# Altium PCB Flashboard.PcbDoc
Units mil, origin at the board's own origin, x right, y up, seen from the top; angles counter-clockwise.
Board outline 3389.98 x 2760.98 mil, 2 copper layers (Top Layer, Bottom Layer), stack 60.4 mil thick; 10 components, 16 nets, 191 pads, 26 vias.
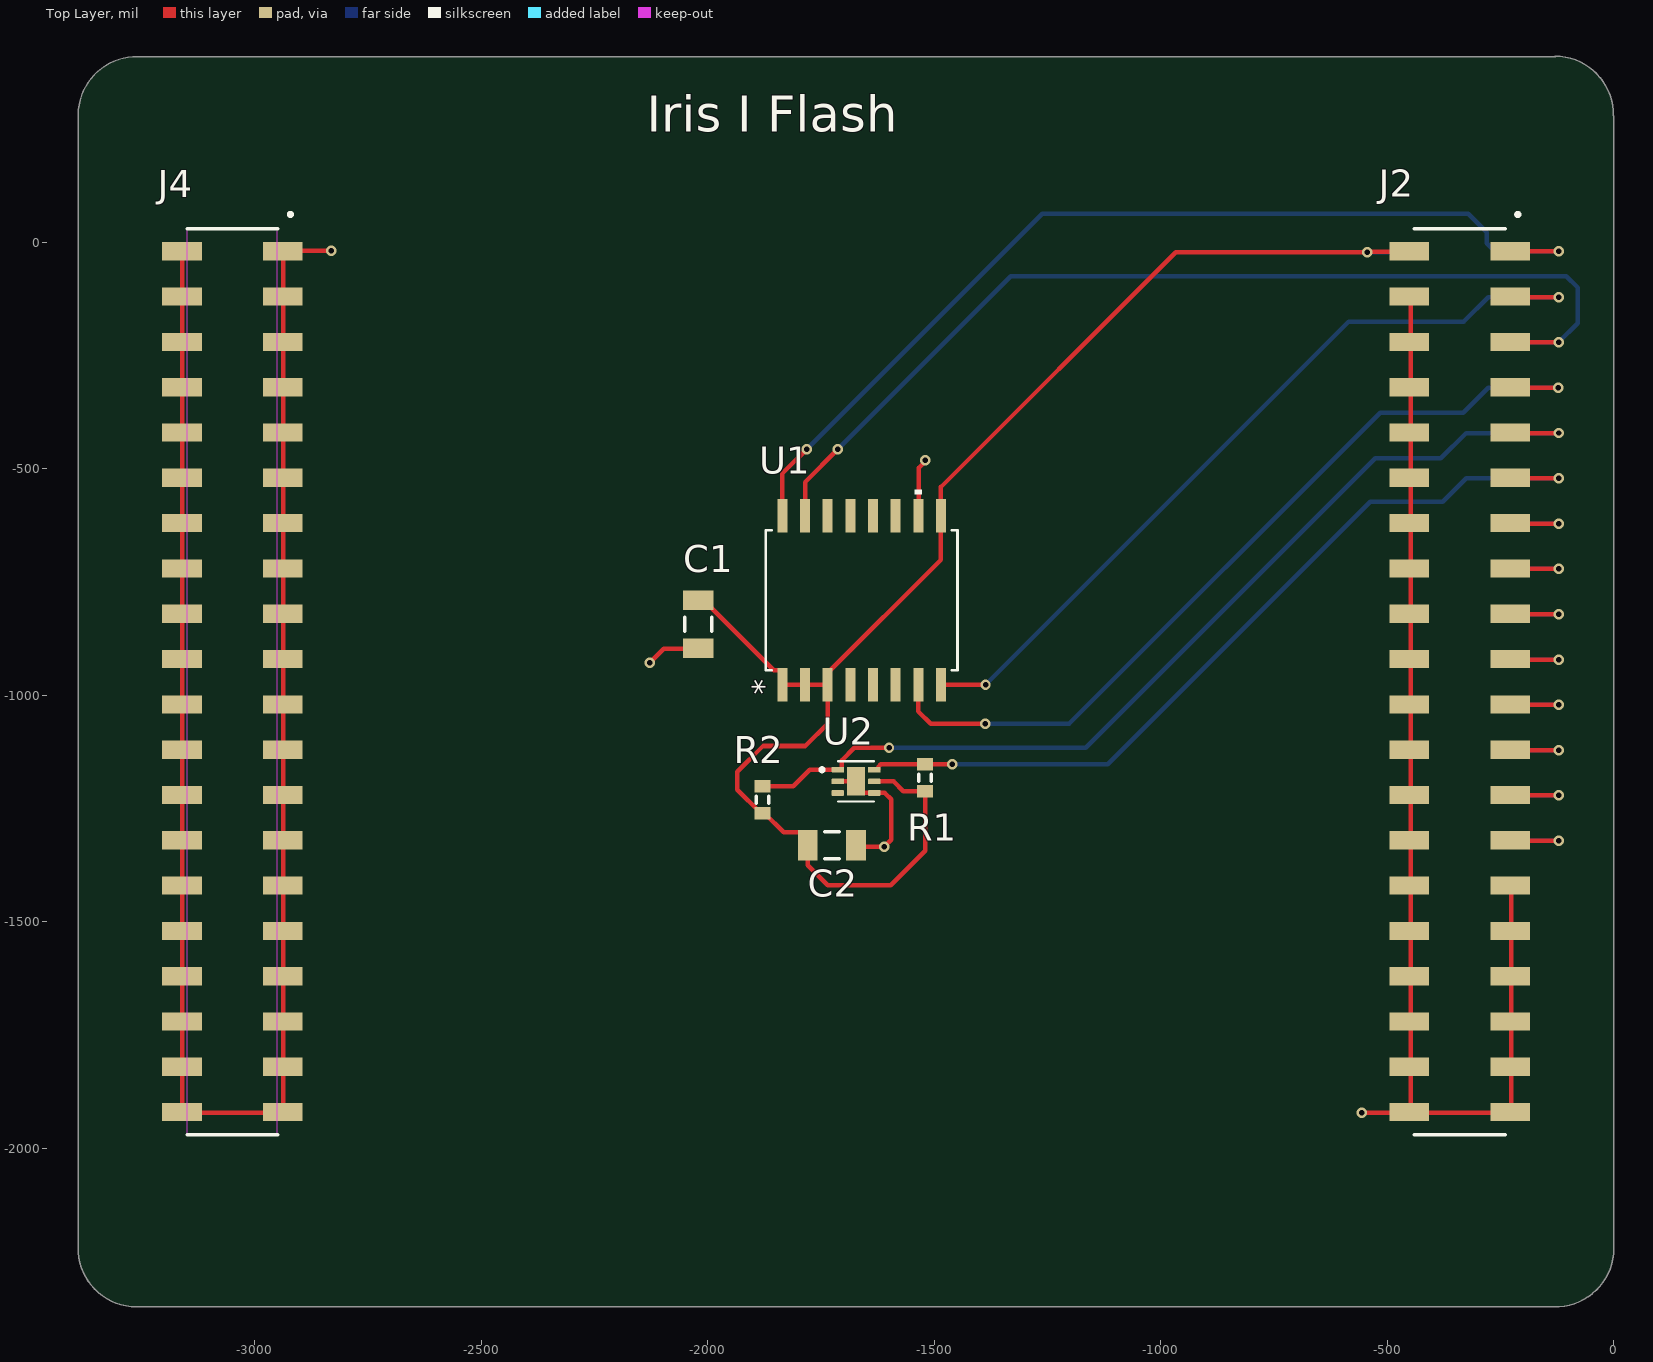
[diagram p0: Top Layer view]
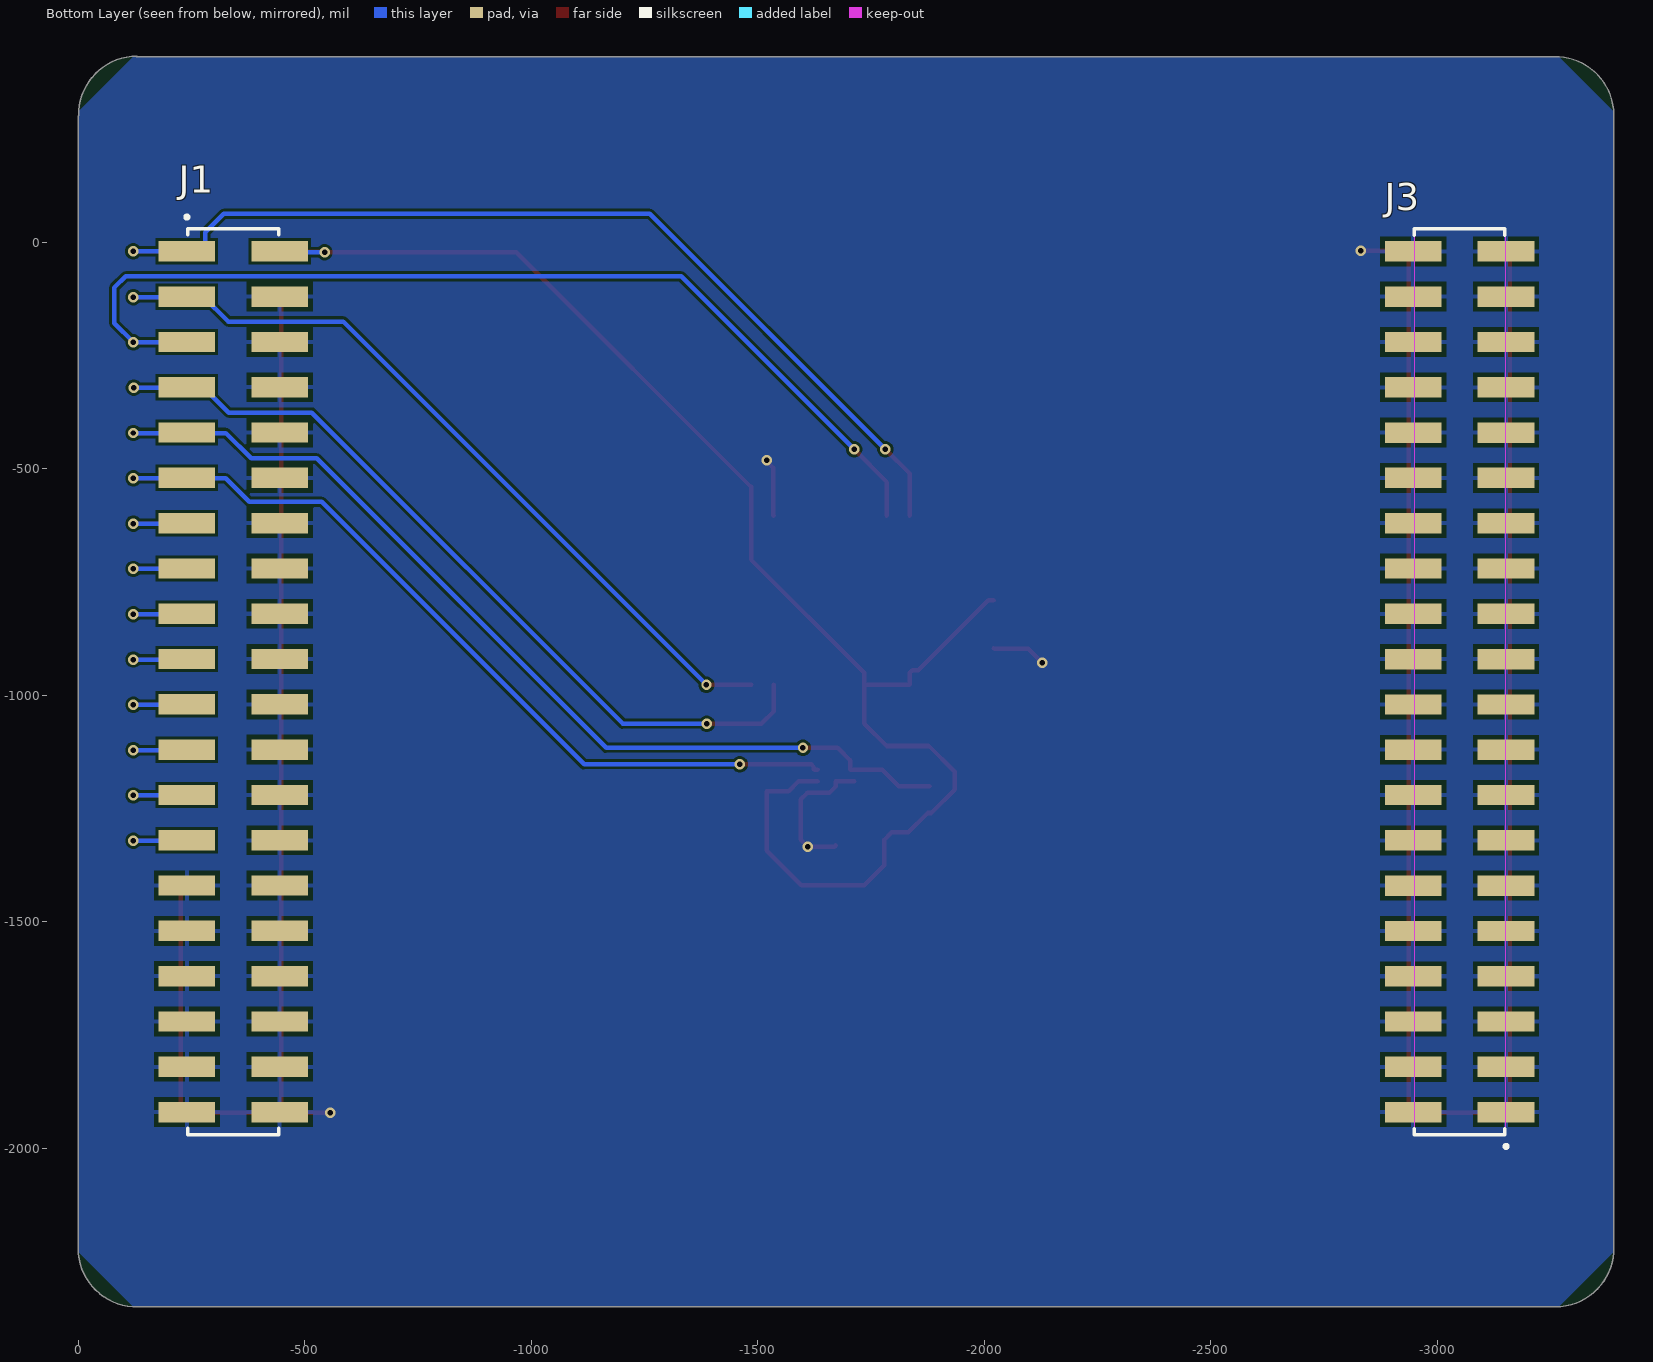
[diagram p1: Bottom Layer view, seen from below]

## Layer stack, top to bottom
Top Solder: solder mask 0.5, Solder Resist, Dk 3.3
Top Layer: signal copper 0.7
Dielectric1: core 59, FR-4, Dk 4.3
Bottom Layer: signal copper 0.7
Bottom Solder: solder mask 0.5, Solder Resist, Dk 3.3

## Board outline
-3389.98,-2218.59 ccw(c-3259.99,-2220.16) -3261.55,-2350.15 -131.55,-2350.15 ccw(c-129.99,-2220.16) 0,-2221.72 0,278.28 -1,279.28 ccw(c-130.99,280.84) -129.43,410.83 -128.43,409.84 -3258.43,409.84 ccw(c-3259.99,279.85) -3389.98,281.41

## Design rules (kind name [scope] priority, off if disabled: settings)
Clearance [All] p1: gap=6 ignorepadtopadclearanceinfootprint=FALSE
DiffPairsRouting [All] p1: maxlimit=10 minlimit=10 mostfreqgap=10 toplayer_minwidth=10 toplayer_maxwidth=10 toplayer_prefwidth=10 bottomlayer_minwidth=10 bottomlayer_maxwidth=10 bottomlayer_prefwidth=10 maxuncoupledlength=500
HoleSize [All] p1: absolutevalues=TRUE maxlimit=300 minlimit=10 maxpercent=80.000 minpercent=20.000
MinimumAnnularRing [All] p1: minimumring=5
MinimumSolderMaskSliver [All] p1: minsoldermaskwidth=4.4
PasteMaskExpansion [All] p1: expansion=10
PlaneClearance [All] p1: clearance=15
PlaneConnect [All] p1: pad.planeconnectstyle=Relief pad.reliefexpansion=20 pad.reliefentries=4 pad.reliefconductorwidth=10 pad.reliefairgap=10 via.planeconnectstyle=Direct via.reliefexpansion=20 via.reliefentries=4 via.reliefconductorwidth=10 via.reliefairgap=10
PolygonConnect [All] p1: thpad.connectstyle=Relief thpad.reliefconductorwidth=10 thpad.reliefentries=4 thpad.polygonreliefangle="90 Angle" thpad.airgapwidth=10 smdpad.connectstyle=Relief smdpad.reliefconductorwidth=10 smdpad.reliefentries=4 smdpad.polygonreliefangle="90 Angle" smdpad.airgapwidth=10 via.connectstyle=Direct via.reliefconductorwidth=10 via.reliefentries=4 via.polygonreliefangle="90 Angle" via.airgapwidth=10
RoutingVias [All] p1: holewidth=12 width=25 viastyle="Through Hole" minholewidth=10 minwidth=20 maxholewidth=30 maxwidth=30
SMDNeckDown [All] p1: percent=100.000
SilkToSolderMaskClearance SilkscreenOverComponentPads [IsPad] p1: minsilkscreentomaskgap=0 clearancetoexposedcopper=TRUE
SolderMaskExpansion [All] p1: expansion=10 istentingtop=FALSE
Width [All] p1: maxlimit=10 minlimit=10 preferedwidth=10
23 further rules are at their usual default settings.

## Components (designator, comment, footprint, x,y, rotation, side; value= is the part's Value field where it differs from the comment)
C1 "Cap Semi" C1206 -2020.99,-843.16 r90 top value=100pF
C2 "Cap Semi" C1206 -1725.99,-1331.16 r0 top value="0.1 uF"
J1 "HW-20-XX-XX-D-XXX-XXX" SAMTEC_HW-20-16-F-D-250-SM -240.06,-20.09 r270 bottom locked
J2 "SSM-120-X-DV" SAMTEC_SSM-120-X-DV -340.06,-970.08 r90 top locked
J3 "HW-20-XX-XX-D-XXX-XXX" SAMTEC_HW-20-16-F-D-250-SM -3151.9,-1920.24 r90 bottom locked
J4 "SSM-120-X-DV" SAMTEC_SSM-120-X-DV -3049.44,-970.08 r90 top locked
R1 "Res3" J1-0603 -1520.33,-1182.16 r90 top value=5K
R2 "Res3" J1-0603 -1879.33,-1230.39 r90 top value=5K
U1 "W25Q128JVFIQ" SOIC_28JVFIQ_WIN -1660.4,-790.01 r90 top
U2 "TMP117MAIDRVT" SON65P200X200X80-7N -1672.84,-1190.03 r0 top

## Footprints (in the part's own frame and the unit in brackets; to place one, negate y for a bottom-side part, rotate by r counter-clockwise, add the part's x,y. Pads: shape width x height; smd on the part's side, far side on the other; paste and mask are expansions set on the pad)
C1206 [mm] "Chip Capacitor, Body 3.2x1.6mm, IPC High Density"
  rect 1.1x1.7 smd: 1(-1.35,0) 2(1.35,0)
  silkscreen extent -0.4,-0.75 0.4,0.75, body extent -1.7,-0.9 1.7,0.9, height 1.3
J1-0603 [mm] "Chip Resistor, Body 1.6x0.8mm, IPC High Density"
  rect 0.7x0.9 smd: 1(-0.75,0) 2(0.75,0)
  silkscreen extent -0.2,-0.35 0.2,0.35, body extent -0.85,-0.48 0.85,0.48, height 0.9
SAMTEC_HW-20-16-F-D-250-SM [mm]
  rect 1.14x3.175 smd: 01(0,0) 02(0,5.205) 03(2.54,0) 04(2.54,5.205) 05(5.08,0) 06(5.08,5.205) 07(7.62,0) 08(7.62,5.205) 09(10.16,0) 10(10.16,5.205) 11(12.7,0) 12(12.7,5.205) 13(15.24,0) 14(15.24,5.205) 15(17.78,0) 16(17.78,5.205) 17(20.32,0) 18(20.32,5.205) 19(22.86,0) 20(22.86,5.205) 21(25.4,0) 22(25.4,5.205) 23(27.94,0) 24(27.94,5.205) 25(30.48,0) 26(30.48,5.205) 27(33.02,0) 28(33.02,5.205) 29(35.56,0) 30(35.56,5.205) 31(38.1,0) 32(38.1,5.205) 33(40.64,0) 34(40.64,5.205) 35(43.18,0) 36(43.18,5.205) 37(45.72,0) 38(45.72,5.205) 39(48.26,0) 40(48.26,5.205)
  silkscreen extent -2.02,-0.1 49.53,5.14
SAMTEC_SSM-120-X-DV [mm]
  rect 1.02x2.22 smd: 01(24.13,-2.825) 02(24.13,2.825) 03(21.59,-2.825) 04(21.59,2.825) 05(19.05,-2.825) 06(19.05,2.825) 07(16.51,-2.825) 08(16.51,2.825) 09(13.97,-2.825) 10(13.97,2.825) 11(11.43,-2.825) 12(11.43,2.825) 13(8.89,-2.825) 14(8.89,2.825) 15(6.35,-2.825) 16(6.35,2.825) 17(3.81,-2.825) 18(3.81,2.825) 19(1.27,-2.825) 20(1.27,2.825) 21(-1.27,-2.825) 22(-1.27,2.825) 23(-3.81,-2.825) 24(-3.81,2.825) 25(-6.35,-2.825) 26(-6.35,2.825) 27(-8.89,-2.825) 28(-8.89,2.825) 29(-11.43,-2.825) 30(-11.43,2.825) 31(-13.97,-2.825) 32(-13.97,2.825) 33(-16.51,-2.825) 34(-16.51,2.825) 35(-19.05,-2.825) 36(-19.05,2.825) 37(-21.59,-2.825) 38(-21.59,2.825) 39(-24.13,-2.825) 40(-24.13,2.825)
  silkscreen extent -25.4,-3.35 26.3,2.54
SOIC_28JVFIQ_WIN [mil]
  rect 74x22 smd paste+0 mask+0: 1(-186.5,175) 2(-186.5,125) 3(-186.5,75) 4(-186.5,25) 5(-186.5,-25) 6(-186.5,-75) 7(-186.5,-125) 8(-186.5,-175) 9(186.5,-175) 10(186.5,-125) 11(186.5,-75) 12(186.5,-25) 13(186.5,25) 14(186.5,75) 15(186.5,125) 16(186.5,175)
  silkscreen extent -154,-212 244,212, body extent -209,-206 209,206, height 104
SON65P200X200X80-7N [mm]
  rrect25% 0.69x0.32 smd: 1(-1.02,0.65) 2(-1.02,0) 3(-1.02,-0.65) 4(1.02,-0.65) 5(1.02,0) 6(1.02,0.65)
  rect 1x1.6 smd paste-2: 7(0,0)
  silkscreen extent -2.01,-1.13 1,1.13, body extent -1,-1 1,1, height 0.8

## Part data
C1 C2: "Capacitor (Semiconductor SIM Model)", LatestRevisionDate=29-May-2009, LatestRevisionNote="IPC-7351 Footprint Added.", PackageDescription="Chip Capacitor", PackageReference=C1206, Published=8-Jun-2000, Publisher="Altium Limited"
J1 J2 J3 J4: Package=None, MF=Samtec, Price=None
  J1 J3: Availability="Not in stock", Check_prices=https://www.snapeda.com/parts/HW-20-08-G-D-350-100/Samtec/view-part/?ref=eda, MP=HW-20-08-G-D-350-100, SnapEDA_Link=https://www.snapeda.com/parts/HW-20-08-G-D-350-100/Samtec/view-part/?ref=snap
  J2 J4: Availability=Unavailable, MP=SSM-120-X-DV
R1 R2: "Resistor", LatestRevisionDate=29-May-2009, LatestRevisionNote="IPC-7351 Footprint Added.", PackageDescription="Chip Resistor", PackageReference=J1-0603, Published=8-Jun-2000, Publisher="Altium Limited"
U1: "No Description Available", Mfr_Name=Winbond, Copyright="Copyright (C) 2022 Ultra Librarian. All rights reserved.", Digi-Key_Part_Number_1=W25Q128JVFIQ-ND, Manufacturer_Part_Number=W25Q128JVFIQ, RefDes=RefDes, Type=DEV
U2: "0.1C accurate digital temperature sensor with integrated NV memory 6-WSON 0 to 85", Package="WSON-6 Texas Instruments", Check_prices=https://www.snapeda.com/parts/TMP117MAIDRVT/Texas+Instruments/view-part/?ref=eda, Digi-Key_Part_Number=296-52215-1-ND, MF="Texas Instruments", MP=TMP117MAIDRVT, Purchase-URL=https://pricing.snapeda.com/search/part/TMP117MAIDRVT/?ref=eda, SnapEDA_Link=https://www.snapeda.com/parts/TMP117MAIDRVT/Texas+Instruments/view-part/?ref=snap

## Via types
v1: diameter 23, hole 12, Top Layer to Bottom Layer, 26 vias

## Nets (pads, with @x,y where several pads share a name; then routed paths per layer and width w, separated by ;. In a path a pad name is that pad's centre, name@x,y a point inside that pad or via, vN(x,y) a via of type N, cw(c..) or ccw(c..) an arc to the next point about the centre after c; other vN are vias at no path point)
GND: C1.1 C2.2 J1.04 J1.06 J1.08 J1.10 J1.12 J1.14 J1.16 J1.18 J1.20 J1.22 J1.24 J1.26 J1.28 J1.29 J1.30 J1.31 J1.32 J1.33 J1.34 J1.35 J1.36 J1.37 J1.38 J1.39 J1.40 J2.04 J2.06 J2.08 J2.10 J2.12 J2.14 J2.16 J2.18 J2.20 J2.22 J2.24 J2.26 J2.28 J2.29 J2.30 J2.31 J2.32 J2.33 J2.34 J2.35 J2.36 J2.37 J2.38 J2.39 J2.40 J3.01 J3.02 J3.03 J3.04 J3.05 J3.06 J3.07 J3.08 J3.09 J3.10 J3.11 J3.12 J3.13 J3.14 J3.15 J3.16 J3.17 J3.18 J3.19 J3.20 J3.21 J3.22 J3.23 J3.24 J3.25 J3.26 J3.27 J3.28 J3.29 J3.30 J3.31 J3.32 J3.33 J3.34 J3.35 J3.36 J3.37 J3.38 J3.39 J3.40 J4.01 J4.02 J4.03 J4.04 J4.05 J4.06 J4.07 J4.08 J4.09 J4.10 J4.11 J4.12 J4.13 J4.14 J4.15 J4.16 J4.17 J4.18 J4.19 J4.20 J4.21 J4.22 J4.23 J4.24 J4.25 J4.26 J4.27 J4.28 J4.29 J4.30 J4.31 J4.32 J4.33 J4.34 J4.35 J4.36 J4.37 J4.38 J4.39 J4.40 U1.10 U2.2 U2.4 U2.7 | length 7323.9
  Top Layer w10: J4.02@-3159.83,-21.16 -3159.83,-121.16 -3159.83,-221.16 -3159.83,-321.16 -3159.83,-421.16 -3159.83,-521.16 -3159.83,-621.16 -3159.83,-721.16 -3159.83,-821.16 -3159.83,-921.16 -3159.83,-1021.16 -3159.83,-1121.16 -3159.83,-1221.16 -3159.83,-1321.16 -3159.83,-1421.16 -3159.83,-1521.16 -3159.83,-1621.16 -3159.83,-1721.16 -3159.83,-1821.16 -3159.83,-1921.16 -2937.39,-1921.16 -2937.39,-1821.16 -2937.39,-1721.16 -2937.39,-1621.16 -2937.39,-1521.16 -2937.39,-1421.16 -2937.39,-1321.16 -2937.39,-1221.16 -2937.39,-1121.16 -2937.39,-1021.16 -2937.39,-921.16 -2937.39,-821.16 -2937.39,-721.16 -2937.39,-621.16 -2937.39,-521.16 -2937.39,-421.16 -2937.39,-321.16 -2937.39,-221.16 -2937.39,-121.16 -2937.39,-21.16 -2935.24,-19 v1(-2831,-19) ; v1(-2127.99,-928.16) -2096.99,-897.16 -2021.84,-897.16 C1.1 ; U2.2 U2.7 -1672.84,-1200.94 -1658.16,-1215.62 -1609.18,-1215.62 -1595.4,-1229.4 -1595.4,-1318.57 v1(-1610.99,-1334.16) -1669.84,-1334.16 C2.2 ; U1.10 -1534.7,-602.8 -1534.7,-498.24 -1520.33,-483.87 v1(-1520.33,-481.17) ; v1(-556.99,-1921.16) J2.40@-448.59,-1921.16 ; J2.04@-448.59,-121.16 -448.59,-221.16 -448.59,-321.16 -448.59,-421.16 -448.59,-521.16 -448.59,-621.16 -448.59,-721.16 -448.59,-821.16 -448.59,-921.16 -448.59,-1021.16 -448.59,-1121.16 -448.59,-1221.16 -448.59,-1321.16 -448.59,-1421.16 -448.59,-1521.16 -448.59,-1621.16 -448.59,-1721.16 -448.59,-1821.16 J2.40@-448.59,-1921.16 ; J2.29@-226.15,-1421.16 -226.15,-1521.16 -226.15,-1621.16 -226.15,-1721.16 -226.15,-1821.16 -226.15,-1921.16 J2.40@-448.59,-1921.16
NetJ1_01: J1.01 J2.01 U1.16 | length 2198.5
  Top Layer w10: U1.16 -1835.4,-510.57 v1(-1781.99,-457.16) ; J2.01@-226.15,-21.16 -225.07,-20.08 v1(-121.47,-20.08)
  Bottom Layer w10: v1(-1781.99,-457.16) -1261.99,62.84 -321.37,62.84 -280.88,22.35 -280.88,-2.65 -263.45,-20.08 v1(-121.47,-20.08)
NetJ1_03: J1.03 J2.03 U1.8 | length 1822.1
  Top Layer w10: U1.8 -1484.75,-977.16 v1(-1386.99,-977.16) ; J2.03@-226.15,-121.16 v1(-122.13,-121.16)
  Bottom Layer w10: v1(-1386.99,-977.16) -584.99,-175.16 -331.43,-175.16 -277.43,-121.16 -237.37,-121.16 v1(-122.13,-121.16)
NetJ1_05: J1.05 J2.05 U1.15 | length 2335.7
  Top Layer w10: U1.15 -1785.4,-529.56 v1(-1713,-457.16) ; J2.05@-226.15,-221.16 v1(-122.13,-221.16)
  Bottom Layer w10: v1(-1713,-457.16) -1331,-75.16 -104.84,-75.16 -79.99,-100.01 -79.99,-179.01 v1(-122.13,-221.16) J1.05@-237.37,-221.16
NetJ1_07: J1.07 J2.07 U1.7 | length 1893.2
  Top Layer w10: U1.7 -1535.4,-1035.75 -1507.99,-1063.16 v1(-1387.99,-1063.16) ; J2.07@-226.15,-321.16 v1(-123.13,-321.16)
  Bottom Layer w10: v1(-1387.99,-1063.16) -1202.64,-1063.16 -515.64,-376.16 -332.43,-376.16 -277.43,-321.16 -237.37,-321.16 v1(-123.13,-321.16)
NetJ1_09: J1.09 J2.09 R2.2 U2.1 | length 2195.4
  Top Layer w10: R2.2 -1811.66,-1200.86 -1775.24,-1164.44 U2.1 -1705.72,-1164.44 -1704.42,-1163.14 -1704.42,-1143.93 -1676.64,-1116.16 v1(-1599.99,-1116.16) ; J2.09@-226.15,-421.16 v1(-122.13,-421.16)
  Bottom Layer w10: v1(-1599.99,-1116.16) -1165.99,-1116.16 -526.99,-477.16 -381.99,-477.16 -325.99,-421.16 -237.37,-421.16 v1(-122.13,-421.16)
NetJ1_11: J1.11 J2.11 R1.2 U2.6 | length 1883.7
  Top Layer w10: U2.6 -1625.4,-1164.44 -1624.1,-1163.14 -1624.1,-1158.49 -1618.24,-1152.63 v1(-1460.84,-1152.63) ; J2.11@-226.15,-521.16 v1(-122.13,-521.16)
  Bottom Layer w10: v1(-1460.84,-1152.63) -1117.46,-1152.63 -537.99,-573.16 -377.99,-573.16 -325.99,-521.16 -237.37,-521.16 v1(-122.13,-521.16)
NetJ1_13: J1.13 J2.13 | length 219.2
  Top Layer w10: J2.13@-226.15,-621.16 v1(-122.13,-621.16)
  Bottom Layer w10: J1.13@-237.37,-621.16 v1(-122.13,-621.16)
NetJ1_15: J1.15 J2.15 | length 219.2
  Top Layer w10: J2.15@-226.15,-721.16 v1(-122.13,-721.16)
  Bottom Layer w10: J1.15@-237.37,-721.16 v1(-122.13,-721.16)
NetJ1_17: J1.17 J2.17 | length 219.2
  Top Layer w10: J2.17@-226.15,-821.16 v1(-122.13,-821.16)
  Bottom Layer w10: J1.17@-237.37,-821.16 v1(-122.13,-821.16)
NetJ1_19: J1.19 J2.19 | length 219.2
  Top Layer w10: J2.19@-226.15,-921.16 v1(-122.13,-921.16)
  Bottom Layer w10: J1.19@-237.37,-921.16 v1(-122.13,-921.16)
NetJ1_21: J1.21 J2.21 | length 219.2
  Top Layer w10: J2.21@-226.15,-1021.16 v1(-122.13,-1021.16)
  Bottom Layer w10: J1.21@-237.37,-1021.16 v1(-122.13,-1021.16)
NetJ1_23: J1.23 J2.23 | length 219.2
  Top Layer w10: J2.23@-226.15,-1121.16 v1(-122.13,-1121.16)
  Bottom Layer w10: J1.23@-237.37,-1121.16 v1(-122.13,-1121.16)
NetJ1_25: J1.25 J2.25 | length 219.2
  Top Layer w10: J2.25@-226.15,-1221.16 v1(-122.13,-1221.16)
  Bottom Layer w10: J1.25@-237.37,-1221.16 v1(-122.13,-1221.16)
NetJ1_27: J1.27 J2.27 | length 219.2
  Top Layer w10: J2.27@-226.15,-1321.16 v1(-122.13,-1321.16)
  Bottom Layer w10: J1.27@-237.37,-1321.16 v1(-122.13,-1321.16)
VCC: C1.2 C2.1 J1.02 J2.02 R1.1 R2.1 U1.1 U1.2 U1.3 U1.9 U2.5 | length 3459.8
  Top Layer w10: C1.2 -2009.18,-790.01 -1854.68,-944.51 -1841.4,-944.51 -1835.4,-950.51 U1.1 U1.2 U1.3 ; U2.5 -1590.05,-1190.03 -1568.4,-1211.68 R1.1 -1520.33,-1343.33 -1596,-1419 -1735,-1419 -1779.14,-1374.86 C2.1 -1779.14,-1319.35 -1795.79,-1302.69 -1832.62,-1302.69 -1875.4,-1259.91 R2.1 -1883.27,-1259.91 -1935,-1208.18 -1935,-1168.93 -1878.07,-1112 -1784.64,-1112 -1735.4,-1062.76 U1.3 ; J2.02@-448.59,-21.16 -542.99,-21.16 v1(-543.99,-22.16) -967.4,-22.16 -1485.4,-540.16 U1.9 -1485.4,-700.51 -1735.4,-950.51 U1.3
  Bottom Layer w10: v1(-543.99,-22.16) -443.29,-22.16 J1.02@-442.29,-21.16
pads on no net: U1.4 U1.5 U1.6 U1.11 U1.12 U1.13 U1.14 U2.3

## Polygon pours and split planes (outlines as drawn)
GND on Bottom Layer "GND_L02_P001" (solid, pour order 1): -3268.51,409.84 -3389.99,288.36 -3389.99,-2228.68 -3268.51,-2350.16 -121.47,-2350.16 0.01,-2228.68 0.01,288.36 -121.47,409.84 -3265.56,409.84

## Keep-outs
Keep-Out Layer:
  rectangle: -3149.99,-1970.16 -2949.99,29.84

## Silkscreen, mask and mechanical layers (free items; w line width, h text height)
Top Overlay:
  text "Iris I Flash" at -2134.85,243.84 h80
Board:
  lines w10: -129.43,410.83 cw(c-130.99,280.84) -1,279.28 ; -3389.98,-2218.59 ccw(c-3259.99,-2220.16) -3261.55,-2350.15 -131.55,-2350.15 ccw(c-129.99,-2220.16) 0,-2221.72 0,278.28 ccw(c-129.99,279.84) -128.43,409.83 -3258.43,409.84 ccw(c-3259.99,279.84) -3389.98,281.41 -3389.99,-2218.59

## Text inside footprints (layer, text, board x,y; h text height)
U1: Top Overlay "*" at -1852.4,-999.01 h50 r90; Top Assembly "*" at -1813.9,-937.01 h50 r90